# EAGLE board Lab2_Board (EAGLE 7.2.0)
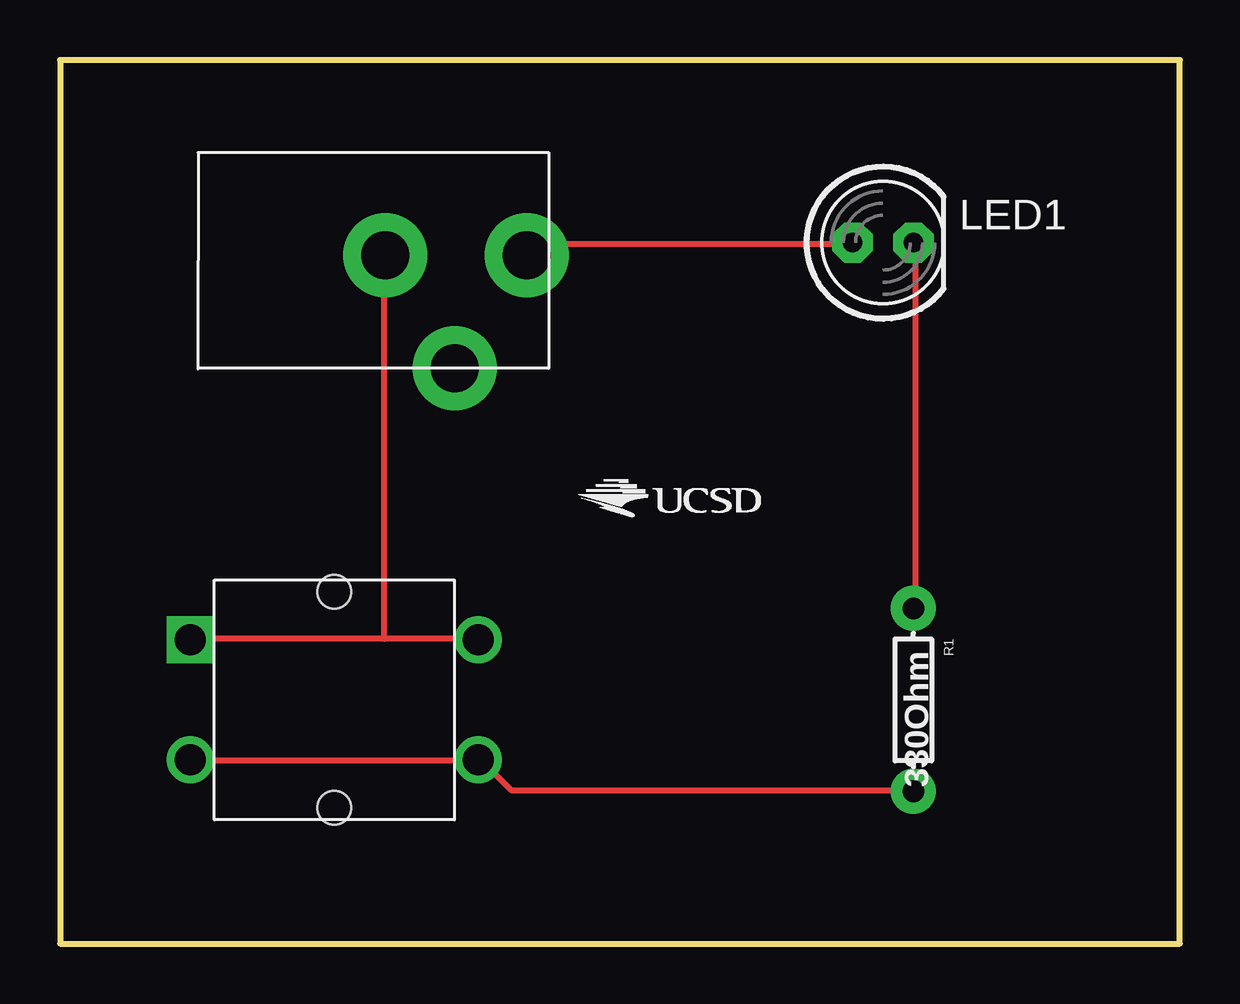
[diagram p0: board, top side]

Size 46.66 x 36.82 mm. Coordinates in mm from the lower left corner, seen from the top.
Outline: 0,0 46.66,0 46.66,36.82 0,36.82 0,0
Copper layers (1*16): Top 0.035559375mm / dielectric 1.501140625mm / Bottom 0.035559375mm
Design rules "4pcb-33board": minimum track width 10mil, minimum drill 15mil, track to track 6mil, track to pad 6mil, pad to pad 6mil, via to via 6mil, smd to smd 6mil, copper to edge 10mil, drill to drill 10mil, minimum pad ring 10mil, minimum via ring 8mil, stop-mask expansion 4mil, vias tented up to drill 0mil, thermal gap 10mil

## Footprints (pad centres in the part's own frame; a part is rotated, then mirrored left to right if it is on the bottom)
PJ-102A = drill 2 pad 3.5: RING -6.77,-4.345; RING_SW -3.87,-9.045; TIP -0.87,-4.345
LED5MM = drill 0.813 pad 1.676 octagon: A -1.27,0; K 1.27,0
AXIAL-0.3 = drill 0.9 pad 1.88: P$1 -3.81,0; P$2 3.81,0
BUTTON-TACTILE-SQUARE-ADAFRUIT1010 = drill 1.3 square: P -6,2.5 | drill 1.3: P2 6,2.5; S -6,-2.5; S2 6,-2.5 | hole 1.4: 0,4.5; 0,-4.5

## Placement (x,y rotation side)
J1  2.1MMJACKTHM  [PJ-102A]  20.32,33.02 0 top
LED1  Yellow  [LED5MM]  34.29,29.21 0 top
R1  330Ohm  [AXIAL-0.3]  35.56,10.16 270 top
S1  BUTTON-TACTILE-SQUARE  [BUTTON-TACTILE-SQUARE-ADAFRUIT1010]  11.43,10.16 0 top
U$1  [UCSD_LOGO]  21.59,17.78 0 top

## Library data of the parts
J1 LED1 R1 S1 = Lab2
U$1 = Logos

## Nets
N$1: J1.TIP LED1.A
N$2: LED1.K R1.P$1
N$3: R1.P$2 S1.S S1.S2
N$4: J1.RING S1.P S1.P2

## Tracks (layer width: path | path; a pad name or v marks a point on that pad's centre or on a via)
N$1
  Top 0.254: LED1.A 33.02,29.16 20.02,29.16 19.61,28.75 J1.TIP
N$2
  Top 0.254: LED1.K 35.66,29.16 35.66,14.12 R1.P$1
N$3
  Top 0.254: R1.P$2 35.46,6.4 18.8,6.4 17.58,7.62 S1.S2 17.37,7.62 5.59,7.62 S1.S
N$4
  Top 0.254: 13.51,12.7 17.37,12.7 S1.P2 | 13.51,12.7 5.59,12.7 S1.P | 13.51,12.7 13.51,28.55 J1.RING